# Altium PCB wheelchair.PcbDoc
Units mil, origin at the board's own origin, x right, y up, seen from the top; angles counter-clockwise.
Board outline 2410.03 x 4060.03 mil, 2 copper layers (A, Power Layer); 38 components, 26 nets, 137 pads, 15 vias.
Unrouted connection lines stored in the file: 23.
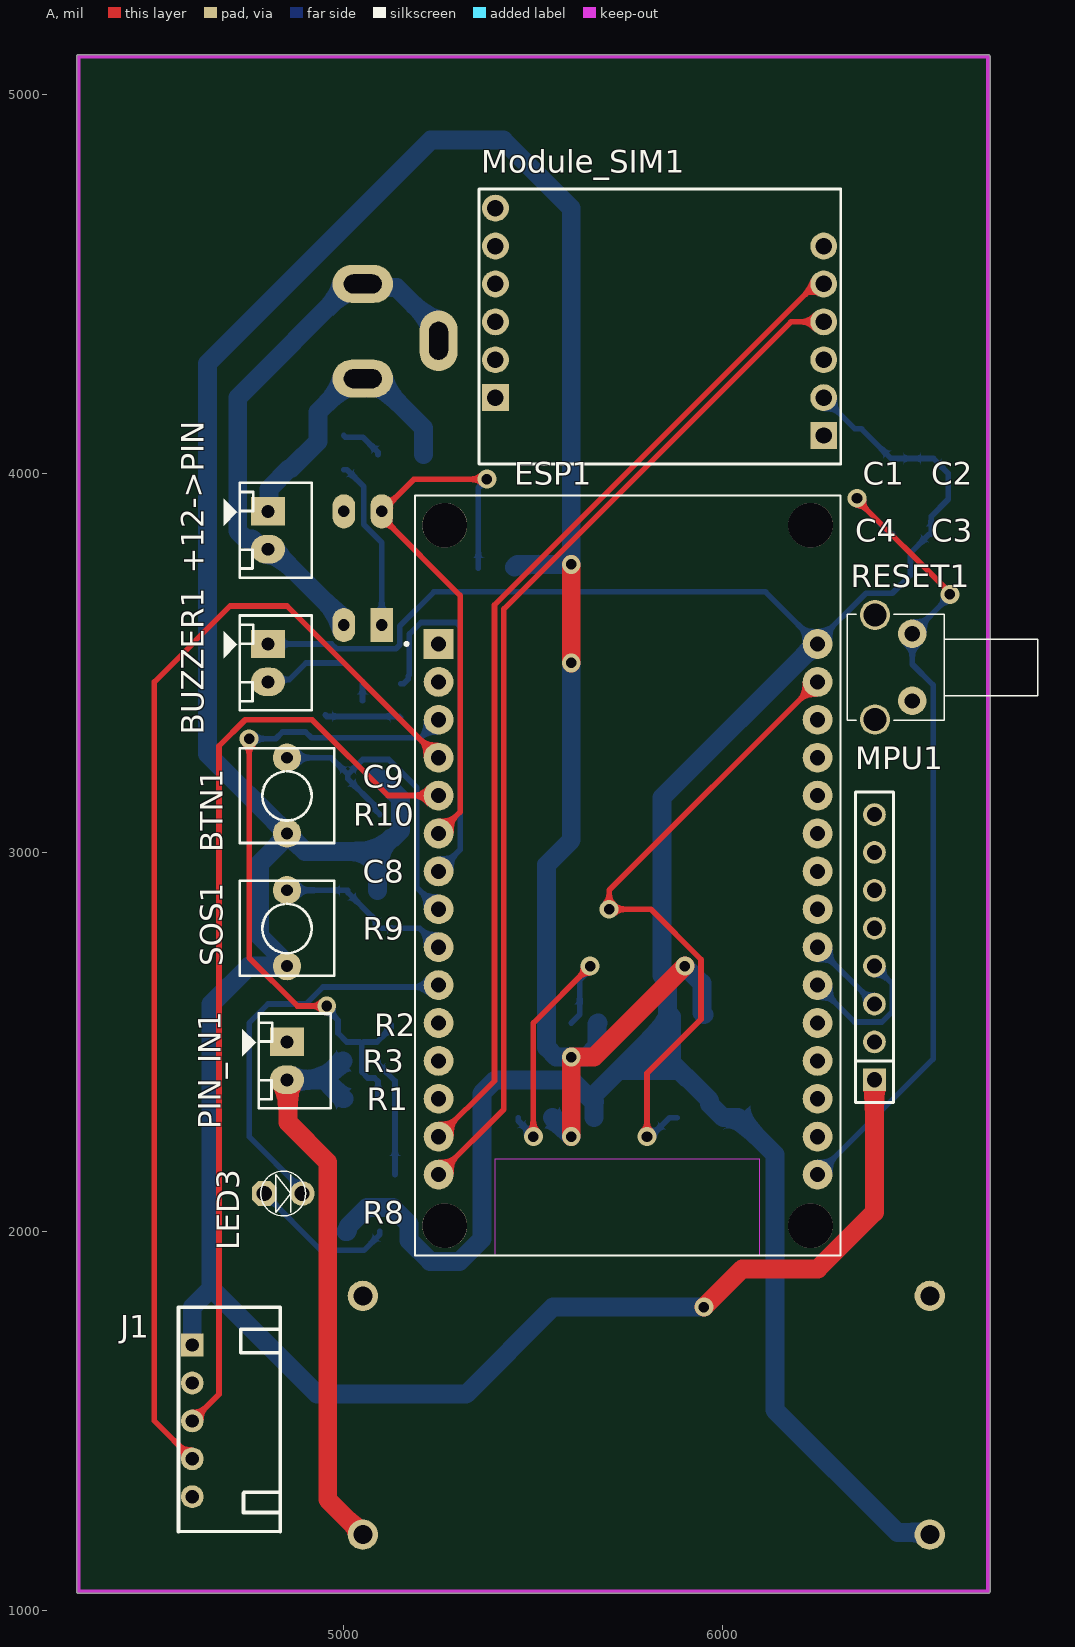
[diagram p0: A view]
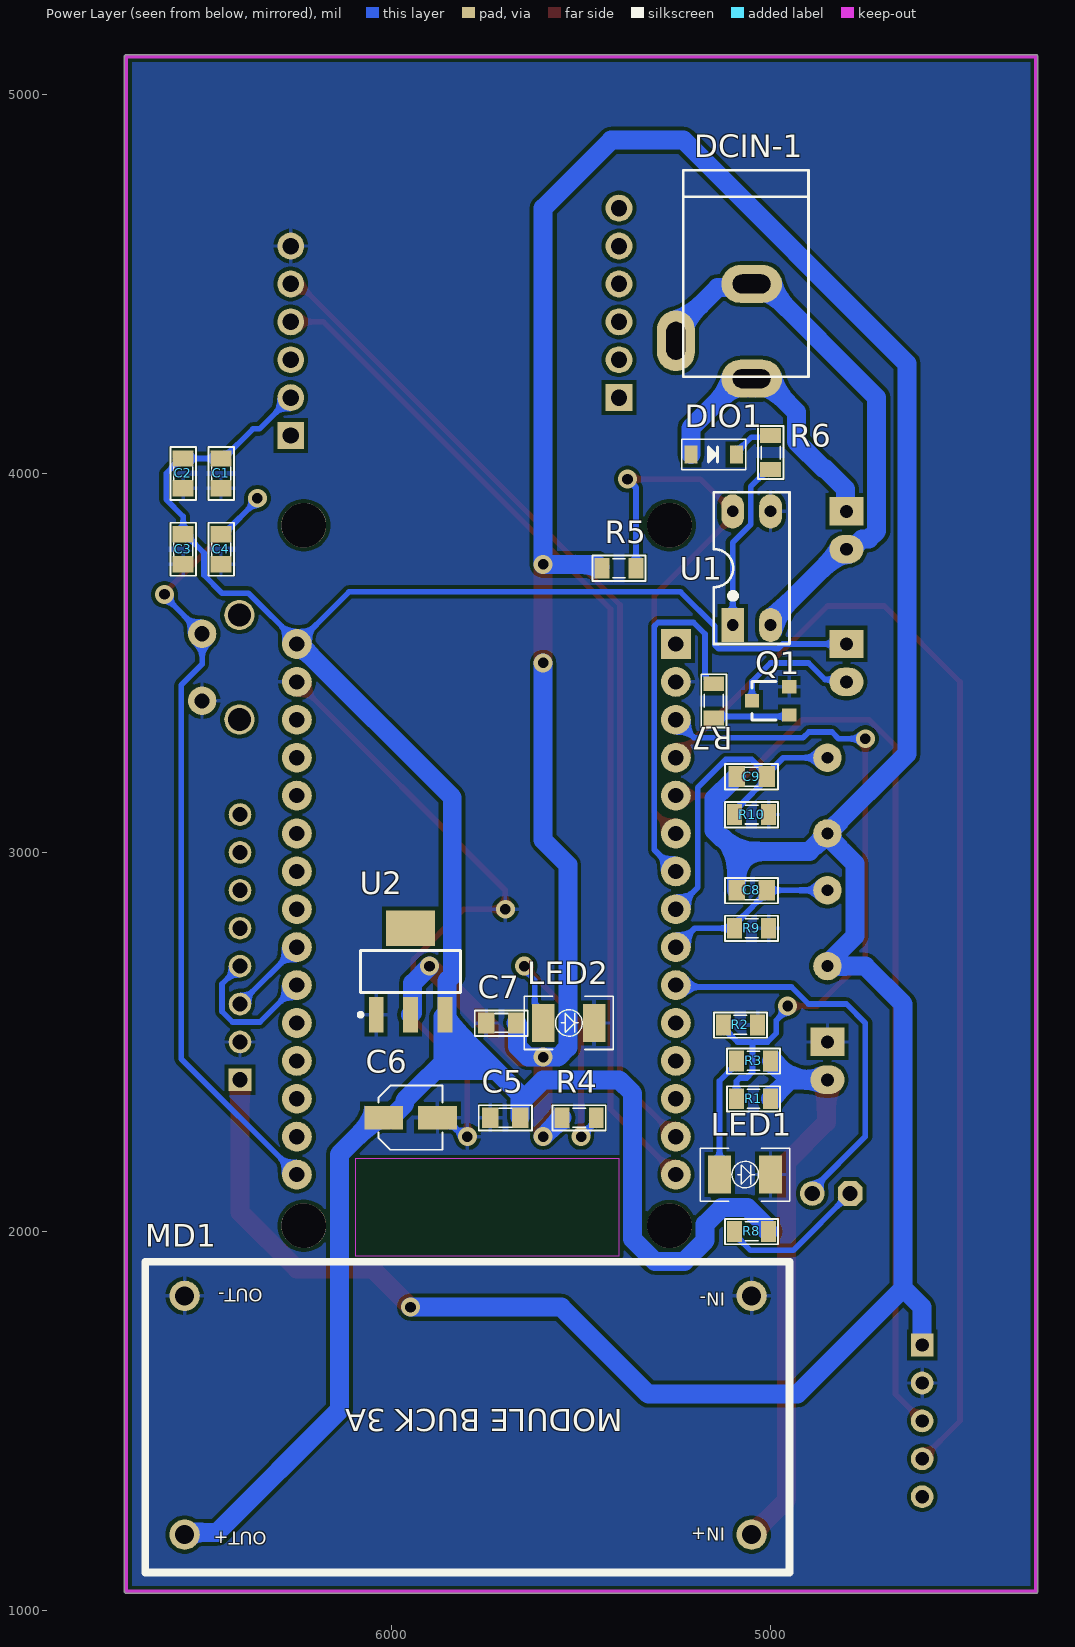
[diagram p1: Power Layer view, seen from below]
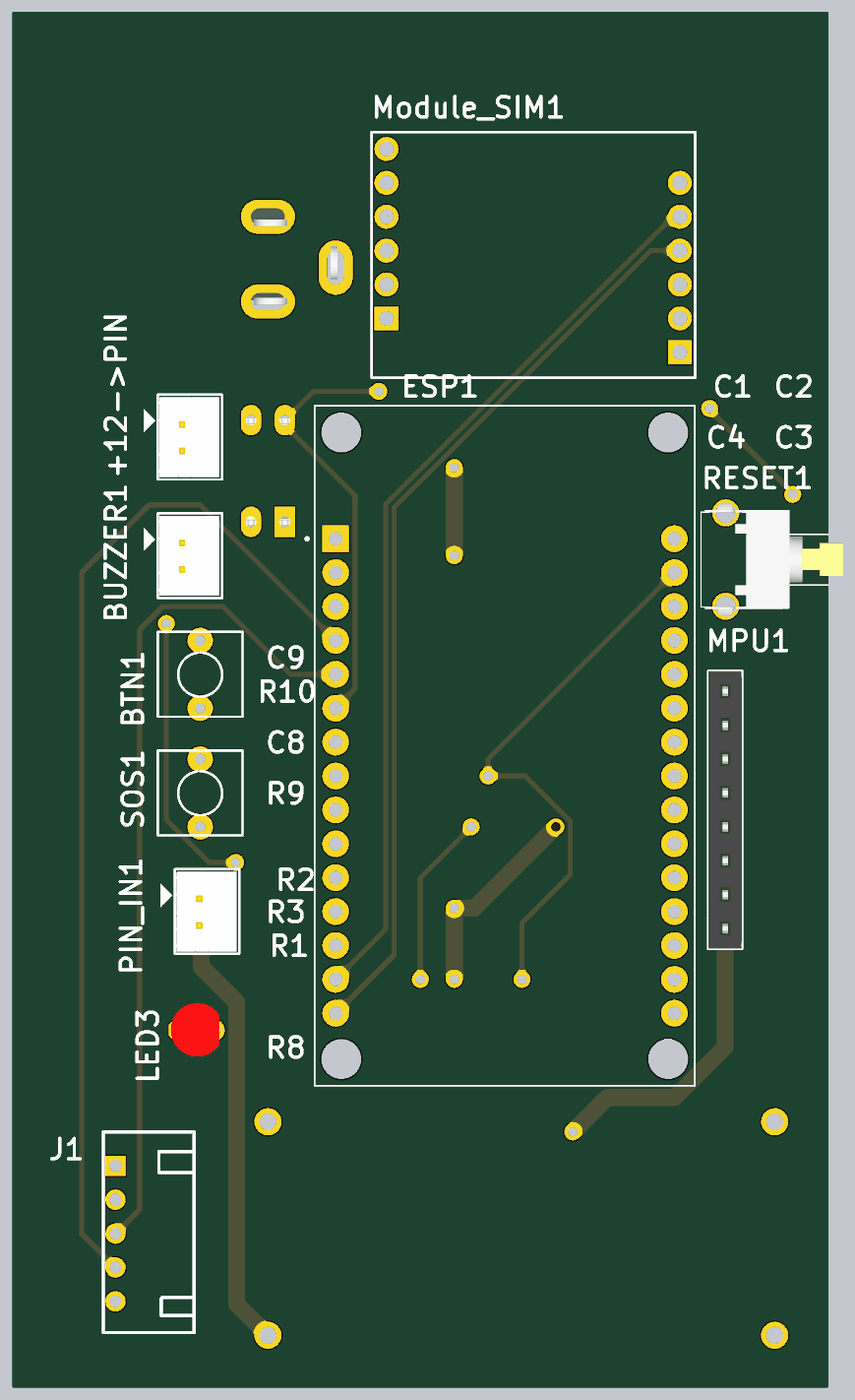
[diagram p2: 3D render of the assembled board from above, using the file's embedded part models]
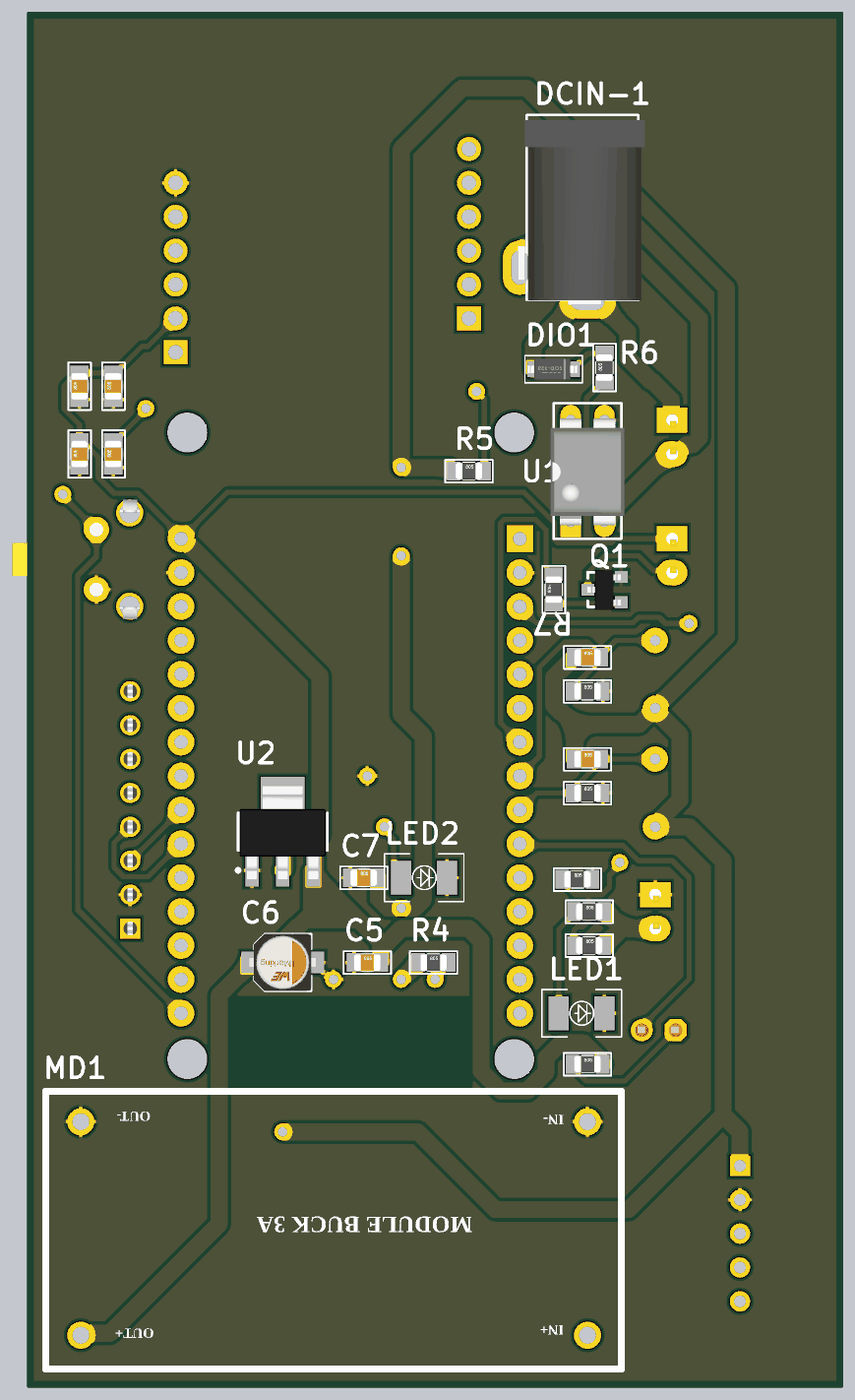
[diagram p3: 3D render of the assembled board from below, using the file's embedded part models]

## Layer stack, top to bottom
Top Solder: solder mask 0.4, Solder Resist, Dk 3.5
A: signal copper 1.4
Dielectric 1: dielectric 12.6, FR-4, Dk 4.8
Power Layer: signal copper 1.4
Bottom Solder: solder mask 0.4, Solder Resist, Dk 3.5

## Board outline
4294.99,1050 4294.98,5100 cw(c4300,5100) 4300,5105.02 6700,5105.02 cw(c6700,5100) 6705.02,5100 6705.02,1050 cw(c6700,1050) 6700,1044.98 4300,1044.98 cw(c4300,1050)

## Design rules (kind name [scope] priority, off if disabled: settings)
Clearance Clearance_1 [All] p1: gap=10 ignorepadtopadclearanceinfootprint=FALSE except(0: Arc-Hole Track-Hole SMDPad-Hole THPad-Hole Via-Hole Fill-Hole Poly-Hole Region-Hole Text-Hole)
Clearance [All] p2: gap=0.2 ignorepadtopadclearanceinfootprint=TRUE
MinimumSolderMaskSliver [All] p1: minsoldermaskwidth=1
PolygonConnect [All] p1: connectstyle=Relief reliefconductorwidth=10 reliefentries=4 polygonreliefangle="90 Angle" airgapwidth=10
RoutingVias [All] p1: holewidth=28 width=50 viastyle="Through Hole" minholewidth=28 minwidth=50 maxholewidth=28 maxwidth=50
SilkToSolderMaskClearance [IsText] p1: minsilkscreentomaskgap=10 clearancetoexposedcopper=TRUE
SolderMaskExpansion [All] p1: expansion=4 istentingtop=FALSE
Width [All] p1: maxlimit=50 minlimit=15 preferedwidth=20
28 further rules are at their usual default settings.

## Classes and differential pairs
component class Designator: "+12 -> PIn" +12->PIN C5 C6 C7 DCIN-1 DIO1 LED1 LED2 PIN_IN1 R1 R2 R3 R4 R5 R6 U1 U2

## Components (designator, comment, footprint, x,y, rotation, side; value= is the part's Value field where it differs from the comment)
+12->PIN "" Header2 4800,3900 r270 top
BTN1 "Nut Nhan 2 Chan ( Dip )" SW2 4850,3050 r90 top
BUZZER1 "Buzzer" Header2 4800,3550 r270 top
C1 "100nF" CN-SMD-0805 6450,4000 r90 bottom value=33pF
C2 "100nF" CN-SMD-0805 6550,4000 r90 bottom value=33pF
C3 "100nF" CN-SMD-0805 6550,3800 r90 bottom value=33pF
C4 "100nF" CN-SMD-0805 6450,3800 r90 bottom value=33pF
C5 "100nF" CN-SMD-0805 5700,2300 r180 bottom value=33pF
C6 "10uF-16V" CAP-ALU-SMD-4.5x5x1.4 5950,2300 r180 bottom
C7 "100nF" CN-SMD-0805 5710.64,2549.99 r180 bottom value=33pF
C8 "100nF" CN-SMD-0805 5050,2900 r180 bottom value=33pF
C9 "100nF" CN-SMD-0805 5050,3200 r180 bottom value=33pF
DCIN-1 "DCIN-12V" DC0 5150,4375 r270 bottom value="Jac DC"
DIO1 "Diode SMD" DIO-SMD-123 5150,4050 r0 bottom value=1N5007
ESP1 "ESP32" MODULE_ESP32_DEVKIT_V1 5750,2939.17 r0 top
J1 "GPS NEO M8N" "Header_Duc Cong_5P 2.54" 4600,1700 r0 top
LED1 "LED" LED-GREEN-0805 5135,2150 r180 bottom value="LED 3 - 5 ly 2 Colour"
LED2 "LED" LED-GREEN-0805 5600,2550 r180 bottom value="LED 3 - 5 ly 2 Colour"
LED3 "LED" LED-3MM-RED 4790,2100 r0 top value="LED 3 ly Single Colour"
MD1 "Module BUCK DC-DC 3A LM2596" "Module Buck 3A" 5050,1200 r0 bottom
Module_SIM1 "Module SIM A7680C" "MODULE SIM" 6216.14,4150 r180 top
MPU1 "MPU6050" JP8-C1T 6400,2400 r90 top
PIN_IN1 "PIN_IN" Header2 4850,2500 r270 top
Q1 "C1815" SOT23-321 5000,3400 r90 bottom
R1 "10k" RES-SMD-0805 5045,2350 r180 bottom
R2 "2k" RES-SMD-0805 5079.69,2545 r180 bottom
R3 "1k" RES-SMD-0805 5045,2450 r180 bottom
R4 "220" RES-SMD-0805 5505,2300 r180 bottom
R5 "10k" RES-SMD-0805 5400,3750 r180 bottom
R6 "10k" RES-SMD-0805 5000,4055 r90 bottom
R7 "1k" RES-SMD-0805 5150,3400 r90 bottom
R8 "1k" RES-SMD-0805 5050,2000 r180 bottom
R9 "10k" RES-SMD-0805 5050,2800 r180 bottom
R10 "10k" RES-SMD-0805 5050,3100 r180 bottom
RESET1 "SW" SW1-DIP 6500,3400 r90 top value="SW chip 2 pin"
SOS1 "Nut Nhan 2 Chan ( Dip )" SW2 4850,2700 r90 top
U1 "PC817" DIP4 5100,3600 r180 bottom
U2 "LM1117-3.3V" SOT223 5950,2685.83 r180 bottom

## Footprints (in the part's own frame and the unit in brackets; to place one, negate y for a bottom-side part, rotate by r counter-clockwise, add the part's x,y. Pads: shape width x height; smd on the part's side, far side on the other; paste and mask are expansions set on the pad)
CAP-ALU-SMD-4.5x5x1.4 [mm]
  rect 2.6x1.6 smd: 1(-1.8,0) 2(1.8,0)
  silkscreen extent -2.15,-2.15 2.15,2.15, body extent -2.5,-2.15 2.5,2.15, height 5.45
CN-SMD-0805 [mil]
  rect 43.31x55 smd: 1(-39.36,0.01) 2(39.37,0.01)
  silkscreen extent -70,-34 70,33, body extent -39,-25 39,25, height 31
DC0 [mil]
  oval 100x160 hole 50 slot 100 at 90 deg: 1(125,100) 2(-125,100)
  oval 160x100 hole 50 slot 100 at 0 deg: 3(25,-100)
  silkscreen extent -425,-80 120,250, body extent -410,-105 134,269, height 434
DIO-SMD-123 [mm]
  rect 0.9x1.2 smd: 1(1.524,0) 2(-1.524,0)
  silkscreen extent -2.16,-1.02 2.16,1.02, body extent -1.76,-0.8 1.94,0.8, height 1.25
DIP4 [mil]
  rect 60x90 hole 31: 1(0,0)
  oval 60x90 hole 31: 2(100,0) 3(100,300) 4(0,300)
  silkscreen extent -50,-50 150,350, body extent -59,-10 159,305, height 170
Header2 [mil]
  rect 75x90 hole 34: 1(0,0)
  oval 75x90 hole 34: 2(100,0)
  silkscreen extent -75,-118 175,115, body extent -68,-70 168,107, height 236
"Header_Duc Cong_5P 2.54" [mil]
  rect 60x60 hole 35: 1(0,0)
  round 60 hole 35: 2(0,-100) 3(0,-200) 4(0,-300) 5(0,-400)
  silkscreen extent -36,-492 232,100
JP8-C1T [mm]
  rect 1.52x1.52 hole 1.02: 1(0,0)
  round 1.52 hole 1.02: 2(2.54,0) 3(5.08,0) 4(7.62,0) 5(10.16,0) 6(12.7,0) 7(15.24,0) 8(17.78,0)
  silkscreen extent -1.52,-1.27 19.3,1.27, body extent -1.52,-1.25 19.3,1.25, height 8.51
LED-3MM-RED [mil]
  oct 65x65 hole 40: 1(0,0)
  round 65 hole 40: 2(100,0)
  silkscreen extent -9,-59 109,59, body extent -27,-77 117,80, height 181
LED-GREEN-0805 [mil]
  rect 60x100 smd: 1(0,0) 2(135,0)
  silkscreen extent -50,-70 185,70, body extent -20,-60 154,60, height 75
"Module Buck 3A" [mil]
  round 80 hole 50: 1(0,0) 2(0,-629.92) 3(1496.06,-629.92) 4(1496.06,0)
  silkscreen extent -100,-720 1600,100
"MODULE SIM" [mm]
  rect 1.8x1.8 hole 1.1: 1(-1.27,1.27) 7(20.73,-1.27)
  round 1.8 hole 1.1: 2(-1.27,-1.27) 3(-1.27,-3.81) 4(-1.27,-6.35) 5(-1.27,-8.89) 6(-1.27,-11.43) 8(20.73,-3.81) 9(20.73,-6.35) 10(20.73,-8.89) 11(20.73,-11.43) 12(20.73,-13.97)
  silkscreen extent -2.41,-15.24 21.84,3.18
MODULE_ESP32_DEVKIT_V1 [mm]
  rect 2x2 / inner round 2 / far side rect 2x2 hole 1.02: 1(-12.7,15.515)
  round 2 hole 1.02: 2(-12.7,12.975) 3(-12.7,10.435) 4(-12.7,7.895) 5(-12.7,5.355) 6(-12.7,2.815) 7(-12.7,0.275) 8(-12.7,-2.265) 9(-12.7,-4.805) 10(-12.7,-7.345) 11(-12.7,-9.885) 12(-12.7,-12.425) 13(-12.7,-14.965) 14(-12.7,-17.505) 15(-12.7,-20.045) 16(12.7,-20.045) 17(12.7,-17.505) 18(12.7,-14.965) 19(12.7,-12.425) 20(12.7,-9.885) 21(12.7,-7.345) 22(12.7,-4.805) 23(12.7,-2.265) 24(12.7,0.275) 25(12.7,2.815) 26(12.7,5.355) 27(12.7,7.895) 28(12.7,10.435) 29(12.7,12.975) 30(12.7,15.515)
  round 3 hole 3 unplated: ""(-12.28,-23.475) ""(-12.28,23.475) ""(12.23,-23.475) ""(12.23,23.475)
  Keep-Out Layer region: 8.78,-25.475 -8.91,-25.475 -8.91,-18.985 8.78,-18.985
  Keep-Out Layer region: 8.78,-25.475 -8.91,-25.475 -8.91,-18.985 8.78,-18.985
  silkscreen extent -14.95,-25.48 14.23,25.48
RES-SMD-0805 [mil]
  rect 39.37x55 smd: 1(-45,0) 2(45,0)
  silkscreen extent -70,-34 70,33, body extent -39,-25 39,25, height 31
SOT23-321 [mm]
  rect 0.9x0.95 smd mask+0: 1(0.95,-1.25)
  rect 0.9x0.95 smd: 2(0,1.25) 3(-0.95,-1.25)
  silkscreen extent -1.3,-0.38 1.3,1.25, body extent -1.52,-1.23 1.48,1.27, height 1.06
SOT223 [mm]
  rect 1x2.4 smd: 1(-2.3,-2.9) 2(0,-2.9) 3(2.3,-2.9)
  rect 3.3x2.4 smd: 4(0,2.9)
  silkscreen extent -3.48,-3.02 3.35,1.4, body extent -3.25,-3.56 3.25,3.4, height 1.68
SW1-DIP [mil]
  round 75 hole 40: 1(0,0) 2(177.16,0)
  round 80 hole 60: ""(-49.21,98.43) ""(226.38,98.43)
  silkscreen extent -51,-331 228,171, body extent -87,-398 265,160, height 283
SW2 [mil] "SW button 2pin, 250x 250 mil"
  round 75 hole 31: 1(0,0) 2(200,0)
  silkscreen extent -25,-125 225,125

## Part data
+12->PIN: library part Header2_1, "Header IDC, 2 x 1 Pin Vertical 2.54mm Pitch (Non-Boxed, Male)", Manufacturer="W¨¹rth Elektronik eiSos GmbH", partNo=613002143121, ComponentLink1 Description=Manufacturer, ComponentLink1URL=http://www.we-online.com, ComponentLink2 Description=Datasheet, ComponentLink2URL=http://katalog.we-online.de/em/datasheet/6130xx143121.pdf, Created by="Karrer Zheng", Created Date="29 March 2013", NoPins=02
BTN1 SOS1: "Cắm", Chung_Loai=Cắm, Don_Vi=Con, Ma_Hang=MH001959, Ten_Linh_Kien="Nút Nhấn 2 Chân 6x6x5MM DIP"
BUZZER1: library part Header2_2, "Header IDC, 2 x 1 Pin Vertical 2.54mm Pitch (Non-Boxed, Male)", Manufacturer="W¨¹rth Elektronik eiSos GmbH", partNo=613002143121, ComponentLink1 Description=Manufacturer, ComponentLink1URL=http://www.we-online.com, ComponentLink2 Description=Datasheet, ComponentLink2URL=http://katalog.we-online.de/em/datasheet/6130xx143121.pdf, Created by="Karrer Zheng", Created Date="29 March 2013", NoPins=02
C1 C2 C3 C4 C5 C7 C8 C9: library part CN
C6: library part CN-ALU-SMD, "Polarized Capacitor (Axial)", LatestRevisionDate=17-Jul-2002, LatestRevisionNote="Re-released for DXP Platform.", PackageReference=POLAR0.8, Published=8-Jun-2000, Publisher="Altium Limited"
DCIN-1: library part DCIN, "Jac DC input"
DIO1: "Default Diode", Code - JEDEC=DO-214-AB, Published=8-Jun-2000, Publisher="Altium Limited", Revision="July-2002: Re-released for DXP Platform."
ESP1: library part ESP32-DEVKIT-V1, "Dual core, Wi-Fi: 2.4 GHz up to 150 Mbits/s,BLE (Bluetooth Low Energy) and legacy Bluetooth, 32 bits, Up to 240 MHz", Package=None, Availability=Unavailable, MP=ESP32-DEVKIT-V1, Price=None
J1: library part "Header 1_2.54_5P", "Cắm", Chung_Loai=Cắm
LED1 LED2: library part "LED SMD"
LED3: "LED Single colour Green and Red"
MD1: library part "Module Buck 3A", "Cắm", Chung_Loai=Cắm, Don_Vi=Con, Ma_Hang=MH002392, Ten_Linh_Kien="Module BUCK DC-DC 3A LM2596 ADJ"
MPU1: library part JP8, "WR-PHD 2.54 mm Angled Socket Header", Manufacturer="W¨¹rth Elektronik eiSos GmbH", partNo=613008143121, ComponentLink1 Description=Manufacturer, ComponentLink1URL=http://www.we-online.com, ComponentLink2 Description=Datasheet, ComponentLink2URL=http://katalog.we-online.de/em/datasheet/6130xx143121.pdf, Created by="Karrer Zheng", Created Date="29 March 2013", NoPins=08
PIN_IN1: library part Header2, "Header IDC, 2 x 1 Pin Vertical 2.54mm Pitch (Non-Boxed, Male)", Manufacturer="W¨¹rth Elektronik eiSos GmbH", partNo=613002143121, ComponentLink1 Description=Manufacturer, ComponentLink1URL=http://www.we-online.com, ComponentLink2 Description=Datasheet, ComponentLink2URL=http://katalog.we-online.de/em/datasheet/6130xx143121.pdf, Created by="Karrer Zheng", Created Date="29 March 2013", NoPins=02
Q1: library part 2SC1815, "NPN 600mW, ECB"
R1 R5 R6 R9 R10: library part Res-SMD, "Resistor", Manufacturer="Generic Components", Class=Passive, Published=08/06/2000, Publisher="Altium Hobart Technology Centre"
R2: library part Res-SMD_1, "Resistor", Manufacturer="Generic Components", Class=Passive, Published=08/06/2000, Publisher="Altium Hobart Technology Centre"
R3 R7 R8: library part Res-SMD_2, "Resistor", Manufacturer="Generic Components", Class=Passive, Published=08/06/2000, Publisher="Altium Hobart Technology Centre"
R4: library part Res-SMD_3, "Resistor", Manufacturer="Generic Components", Class=Passive, Published=08/06/2000, Publisher="Altium Hobart Technology Centre"
RESET1: library part SW2, "Switch button 2 pin"
U1: "Single Opto"
U2: library part LM1117, "800mA Low-Dropout Linear Regulator", Creator="Nguyen Ba Bien", Website=http://group3i.net

## Via types
v1: diameter 50, hole 28, A to Power Layer, 15 vias

## Nets (pads, with @x,y where several pads share a name; then routed paths per layer and width w, separated by ;. In a path a pad name is that pad's centre, name@x,y a point inside that pad or via, vN(x,y) a via of type N, cw(c..) or ccw(c..) an arc to the next point about the centre after c; other vN are vias at no path point)
+3.3VDC: BTN1.1 C7.2 C8.1 C9.1 J1.1 MPU1.1 R4.1 R5.1 SOS1.1 U2.2 | length 10646.8
  A w50: v1(5600,2250) v1(5600,2460) 5660,2460 v1(5900,2700) ; v1(5600,3500) v1(5600,3760) ; v1(5950,1800) 6051.22,1901.22 6250.77,1901.22 6400,2050.45 MPU1.1
  Power Layer w50: J1.1 4600,1800 4650,1850 ; C8.1 5089.36,3002.51 ; C9.1 5090.21,3200.01 5127.72,3162.5 5129.18,3162.5 5149.69,3142 5149.69,3058 5129.18,3037.5 5124.36,3037.5 5089.36,3002.51 ; R5.1@5450.32,3752.5 5457.82,3760 v1(5600,3760) 5600,4700 5420.71,4879.29 5229.29,4879.29 4640,4290 4640,3260 BTN1.1 ; R4.1 v1(5600,2250) ; v1(5600,3500) 5600,3032.5 5535,2967.5 5535,2485.5 5560.5,2460 v1(5600,2460) 5639.5,2460 5667.91,2488.42 5667.91,2547.5 5670.41,2550 C7.2 ; v1(5900,2700) 5944.69,2655.31 5944.69,2576.97 U2.2 ; v1(5950,1800) 5551.79,1800 5322.5,1570.71 4929.29,1570.71 4650,1850 ; 4650,1850 4650,2600 4750,2700 SOS1.1 4850,2706.76 4777.5,2779.26 4777.5,2970.74 4850,3043.24 BTN1.1 ; BTN1.1 4897.49,3002.51 5089.36,3002.51
+5VDC: BUZZER1.1 C1.2 C2.2 C3.2 C5.2 C6.1 ESP1.30 MD1.4 Module_SIM1.2 R8.2 U2.3 | length 7091.5
  Power Layer w15: BUZZER1.1 4967.82,3550 4980.32,3537.5 5137.25,3537.5 5147.5,3547.75 5147.5,3597.5 5237.5,3687.5 6112.5,3687.5 ESP1.30 6250,3556.12 6377.76,3683.88 6447.15,3683.88 6495.01,3731.73 6495.01,3790.22 6544.16,3839.37 C3.2 6550.01,3886.73 6595.01,3931.73 6595.01,4000.22 6555.85,4039.37 C2.2 C1.2 6444.16,4039.37 6365.89,4117.64 6348.5,4117.64 Module_SIM1.2
  Power Layer w50: R8.2 5007.82,2000 5010.32,2002.5 5010.32,2012 5060.82,2062.5 5129.18,2062.5 5172.48,2019.2 5172.48,1976 5227.58,1920.91 5305.49,1920.91 5364.21,1979.62 5364.21,2364.21 5400,2400 5600,2400 5657.84,2342.16 5661.8,2342.16 ; C5.2 5660.63,2360.63 5849.41,2549.41 U2.3@5854.13,2549.41 ; ESP1.30 6244.82,3550 5840,3145.18 5840,2674.85 5854.13,2660.72 5854.13,2576.97 5864.76,2566.34 5864.76,2444.69 5904.72,2404.72 5905.65,2405.65 5965.31,2345.99 5965.31,2335.87 6001.18,2300 C6.1 6040.55,2300 6137.44,2203.11 6137.44,1528.7 6460.4,1205.74 6540.32,1205.74 MD1.4
+VPIN: MD1.1 PIN_IN1.2 R1.2 R3.2 | length 1533.6
  A w50: PIN_IN1.2@4857.5,2400 PIN_IN1.2 4852.64,2397.36 4852.64,2287.5 4957.5,2182.64 4957.5,1292.5 MD1.1
  Power Layer w50: PIN_IN1.2 4947.5,2400 ; R3.2@4997.5,2450 4997.19,2450 4994.69,2447.5 4994.69,2447.19 4947.5,2400 ; R1.2 4997.19,2350 4994.69,2352.5 4994.69,2355.31 4950,2400 4947.5,2400
BUTTON1: C8.2 ESP1.9 R9.1 SOS1.2 | length 471.3
  Power Layer w15: SOS1.2 C8.2 ; C8.2 5010.63,2894.16 5082.82,2821.97 5082.82,2812.19 R9.1 5200,2800 ESP1.9
BUTTON2: BTN1.2 C9.2 ESP1.8 R10.1 | length 893.1
  Power Layer w15: BTN1.2 4966.48,3250 C9.2@5010.63,3205.85 ; R10.1 5082.82,3112.19 5082.82,3121.97 5010.63,3194.16 C9.2 C9.2@5010.63,3205.85 ; ESP1.8 5192.19,2907.81 5192.19,3171.09 5118.27,3245.01 5049.78,3245.01 C9.2@5010.63,3205.85
BUZZER_ALERT: ESP1.7 R7.2 | length 966.5
  Power Layer w15: R7.2 5157.81,3445 5170,3457.18 5170,3465 5172.97,3467.97 5172.97,3576.46 5203.38,3606.87 5296.62,3606.87 5306.87,3596.62 5306.87,3006.87 ESP1.7
DCIN_12V: +12->PIN.1 DCIN-1.1 DIO1.1 | length 757.4
  Power Layer w50: +12->PIN.1 4800,3909.78 4802.72,3912.5 4802.72,3959.36 4856.46,4013.1 4860.52,4013.1 4931.61,4084.19 4931.61,4161.61 5020,4250 DCIN-1.1 5080,4250 5210,4120 DIO1.1
DCIN_GND: +12->PIN.2 DCIN-1.2 DCIN-1.3 U1.2 | length 1475.9
  Power Layer w50: U1.2 5000,3612.29 4812.29,3800 +12->PIN.2 4785.74,3800 4758.24,3827.5 4740.5,3827.5 4720,3848 4720,4200 5020,4500 DCIN-1.2 5059.57,4490.43 5139.57,4490.43 5250,4380 DCIN-1.3
ESP_RST: C4.2 ESP1.16 RESET1.2 | length 2214.6
  A w15: v1(6354.03,3934.48) 6354.03,3930.26 6599.23,3685.06 v1(6599.23,3680.84)
  Power Layer w15: ESP1.16 6555,2455 6555,3441.57 6500,3496.57 RESET1.2 6599.23,3676.4 v1(6599.23,3680.84) ; v1(6354.03,3934.48) 6354.03,3929.5 6444.16,3839.37 C4.2
GND: C1.1 C2.1 C3.1 C4.1 C5.1 C6.2 C7.1 ESP1.2 ESP1.29 J1.2 LED1.2 LED2.2 MD1.2 MD1.3 Module_SIM1.6 MPU1.2 PIN_IN1.1 Q1.1 R2.2 R9.2 R10.2 RESET1.1 U1.3 U2.1 | length 1751.6
  A w15: v1(5800,2250) 5800,2417.29 5942.5,2559.79 5942.5,2717.6 5810.1,2850 v1(5700,2850) 5700,2900 ESP1.29
  Power Layer w15: v1(5800,2250) 5809.45,2250 5859.45,2300 C6.2
GPS_RX: ESP1.5 J1.3 | length 2500.9
  A w15: J1.3 4670.5,1570.5 4670.5,3280.61 4739.9,3350 4916.38,3350 5116.38,3150 ESP1.5
GPS_TX: ESP1.4 J1.4 | length 3089.9
  A w15: J1.4 4500,1500 4500,3450 4700,3650 4850,3650 ESP1.4
LED_ALERT: ESP1.10 LED3.2 | length 1049.4
  Power Layer w15: LED3.2 4890,2110 4750,2250 4750,2550 4800,2600 4900,2600 4945,2645 5245,2645 ESP1.10
M_SCL: ESP1.22 MPU1.3 | length 212.1
  Power Layer w15: ESP1.22 MPU1.3
M_SDA: ESP1.21 MPU1.4 | length 388.6
  Power Layer w15: ESP1.21 6347.42,2552.58 6419.64,2552.58 6447.42,2580.36 6447.42,2652.58 MPU1.4
NetBUZZER1_2: BUZZER1.2 Q1.2 | length 341.1
  Power Layer w15: BUZZER1.2 4806.18,3456.18 4856.18,3456.18 4900,3500 5000,3500 5049.21,3450.79 Q1.2
NetDIO1_2: DIO1.2 R6.2 | length 114.2
  Power Layer w15: R6.2 5004.09,4095.91 5050,4095.91 5090,4055.91 DIO1.2
NetLED1_1: LED1.1 R3.1 | length 318.6
  Power Layer w15: R3.1 5090,2442.19 5135,2397.19 LED1.1
NetLED2_1: LED2.1 R4.2 | length 749.4
  A w15: v1(5500,2250) 5500,2550 v1(5650,2700)
  Power Layer w15: R4.2 5460,2292.19 5500,2252.19 v1(5500,2250) ; LED2.1 5622.5,2572.5 5622.5,2663.03 5650,2690.53 v1(5650,2700)
NetLED3_1: LED3.1 R8.1 | length 392.4
  Power Layer w15: LED3.1 4940,1950 5052.82,1950 5095,1992.19 R8.1
NetQ1_3: Q1.3 R7.1 | length 211.2
  Power Layer w15: Q1.3@4951.77,3362.6 Q1.3 4954.59,3358.8 5146.2,3358.8 R7.1 R7.1@5142.19,3355
NetR6_1: R6.1 U1.1 | length 456
  Power Layer w15: R6.1 5007.81,4010 5052.5,3965.31 5052.5,3865.32 5100,3817.82 U1.1
PIN_LV: ESP1.3 R1.1 R2.1 | length 1812.6
  A w15: v1(4750,3300) 4750,2722.22 4877.45,2594.77 v1(4954.87,2594.77)
  Power Layer w15: v1(4750,3300) 4820.35,3300 4838.17,3317.82 4899.05,3317.82 4914.48,3302.38 5202.38,3302.38 ESP1.3 ; v1@4948.18,2588.07 v1(4954.87,2594.77) 4954.87,2587.17 4984.66,2557.38 4984.66,2523.09 5007.75,2500 5042.18,2500 5047.5,2494.68 ; R1.1 5090,2396.21 5081.21,2405 5063.07,2405 5047.5,2420.57 5047.5,2494.68 ; R2.1 5124.69,2537.19 5087.5,2500 5052.82,2500 5047.5,2494.68
PW_CNECT: ESP1.6 R5.2 U1.4 | length 1517.6
  A w15: ESP1.6 5306.87,3106.87 5306.87,3678.13 5100,3885 U1.4 5100,3902.82 5120.79,3923.61 5123.61,3923.61 5184.84,3984.84 v1(5377.42,3984.84)
  Power Layer w15: R5.2 5355,3962.41 v1(5377.42,3984.84)
SIM_RX: ESP1.14 Module_SIM1.5 | length 2683.6
  A w15: ESP1.14 5397.3,2397.3 5397.3,3652.76 6233.85,4489.31 6255.45,4489.31 Module_SIM1.5
SIM_TX: ESP1.15 Module_SIM1.4 | length 2721.4
  A w15: ESP1.15 5422.3,2322.3 5422.3,3642.4 6179.9,4400 Module_SIM1.4
pads on no net: ESP1. ESP1.1 ESP1.11 ESP1.12 ESP1.13 ESP1.17 ESP1.18 ESP1.19 ESP1.20 ESP1.23 ESP1.24 ESP1.25 ESP1.26 ESP1.27 ESP1.28 J1.5 Module_SIM1.1 Module_SIM1.3 Module_SIM1.7 Module_SIM1.8 Module_SIM1.9 Module_SIM1.10 Module_SIM1.11 Module_SIM1.12 MPU1.5 MPU1.6 MPU1.7 MPU1.8 RESET1. U2.4

## Polygon pours and split planes (outlines as drawn)
GND on Power Layer "GND_L02_P000" (solid, pour order 0): 6700,1050 6700,5100 4300,5100 4300,1050

## Keep-outs
Keep-Out Layer:
  lines w10: 4300,1050 4300,5100 6700,5100 6700,1050 4300,1050

## Other copper
Power Layer:
  region net +5VDC: 5700,2400 5925,2400 5929.72,2404.72 5875,2459.45 5875,2575

## Text inside footprints (layer, text, board x,y; h text height)
MD1: Bottom Overlay "MODULE BUCK 3A" at 5390,1550 h100 r180; Bottom Overlay "IN+" at 5120,1230 h60 r180; Bottom Overlay "IN-" at 5120,1850 h60 r180; Bottom Overlay "OUT-" at 6340,1860 h60 r180; Bottom Overlay "OUT+" at 6330,1220 h60 r180